# Altium PCB USB_TypeA_RevB.PcbDoc
Units mm, origin at the board's own origin, x right, y up, seen from the top; angles counter-clockwise.
Board outline 47 x 16 mm, 2 copper layers (Top Layer, Bottom Layer), stack 1.271 mm thick; 31 components, 24 nets, 131 pads, 31 vias.
Unrouted connection lines stored in the file: 17.
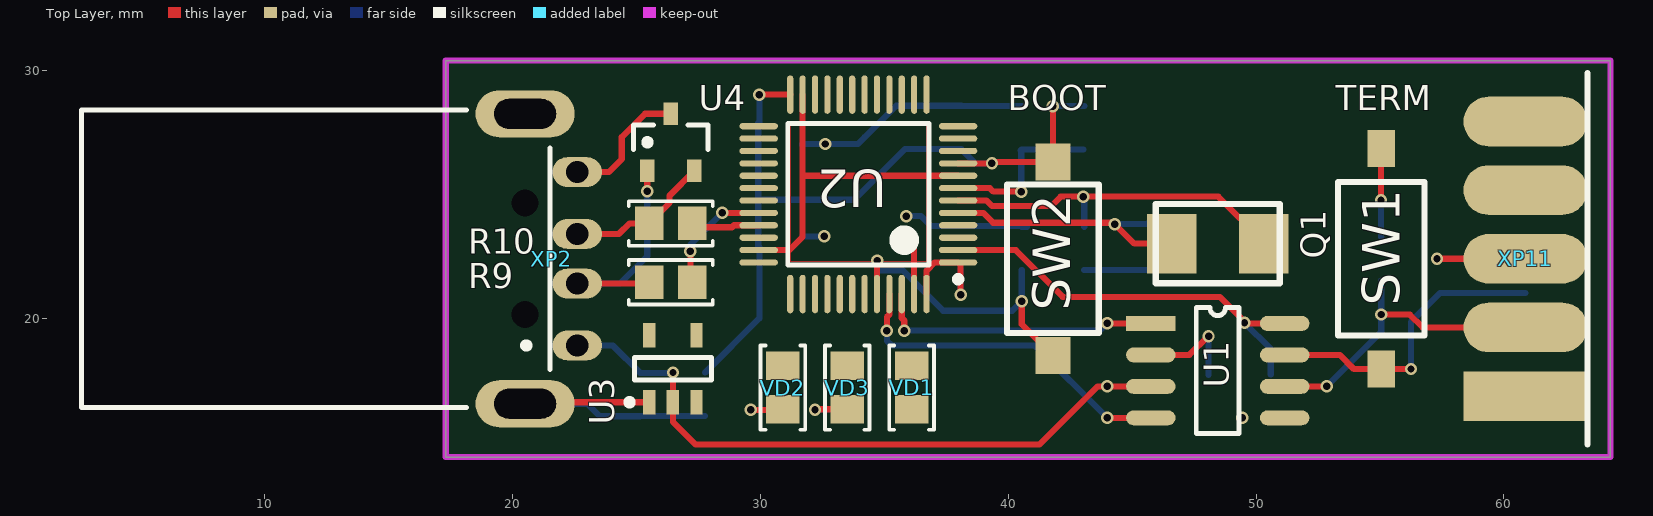
[diagram p0: Top Layer view]
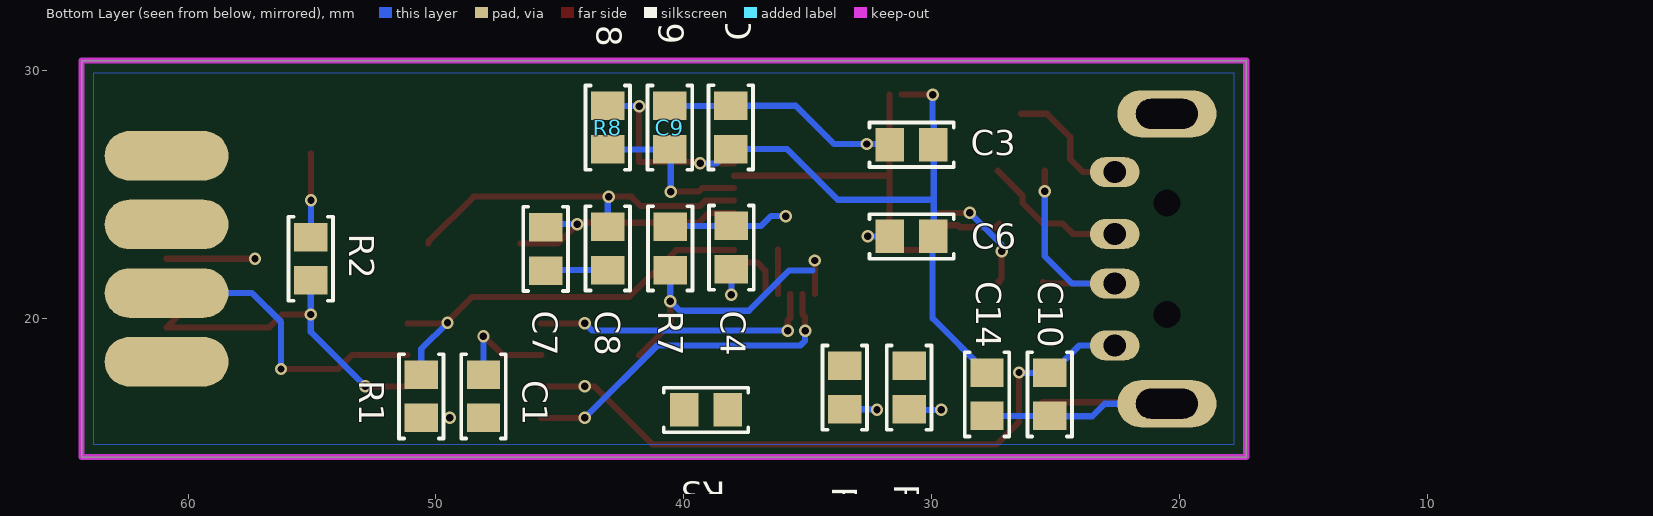
[diagram p1: Bottom Layer view, seen from below]

## Layer stack, top to bottom
Top Solder: solder mask 0.0102, Solder Resist, Dk 3.5
Top Layer: signal copper 0.0356
Dielectric 1: dielectric 1.2, FR-4, Dk 4.8
Bottom Layer: signal copper 0.0356
Bottom Solder: solder mask 0.0102, Solder Resist, Dk 3.5

## Board outline
17.3,14.4 17.3,30.4 64.3,30.4 64.3,14.4

## Design rules (kind name [scope] priority, off if disabled: settings)
Clearance [All] p1: gap=0.2 ignorepadtopadclearanceinfootprint=FALSE except(0: Arc-Hole Track-Hole SMDPad-Hole THPad-Hole Via-Hole Fill-Hole Poly-Hole Region-Hole Text-Hole; 0.254: Fill-Fill Fill-Poly Fill-Region Fill-Text Poly-Poly Poly-Region Poly-Text Region-Region Region-Text Text-Text)
MinimumAnnularRing [All] p1: minimumring=0.076
PolygonConnect [All] p1: connectstyle=Relief reliefconductorwidth=0.254 reliefentries=4 polygonreliefangle="90 Angle" airgapwidth=0.254
RoutingVias [All] p1: holewidth=0.3 width=0.5 viastyle="Through Hole" minholewidth=0.3 minwidth=0.5 maxholewidth=0.5 maxwidth=0.7
SilkToSilkClearance [All] p1: silktosilkclearance=0.2
SilkToSolderMaskClearance [IsPad] p1: minsilkscreentomaskgap=0.2 clearancetoexposedcopper=TRUE
SolderMaskExpansion [All] p1: expansion=0.102
Width [All] p1: maxlimit=0.4 minlimit=0.2 preferedwidth=0.25 minimp=50.000000 maximp=50.000000 favimp=50.000000
28 further rules are at their usual default settings.

## Classes and differential pairs
component class CAN: C1 R1 R2 SW1 U1 XP11
component class MCU: C3 C4 C5 C6 C7 C8 C9 Q1 R3 R4 R5 R7 R8 SW2 U2 VD1 VD2 VD3
component class PWR: C10 C14 U3
component class USB: R9 R10 U4 XP2

## Components (designator, comment, footprint, x,y, rotation, side; value= is the part's Value field where it differs from the comment)
C1 "100nF" SMD_0805 48.079,16.85 r90 bottom
C3 "100nF" SMD_0805 30.8,27 r0 bottom
C4 "100nF" SMD_0805 38.075,22.85 r90 bottom
C5 "100nF" SMD_0805 38.1,27.7 r90 bottom
C6 "100nF" SMD_0805 30.8,23.3 r0 bottom
C7 "22pF" SMD_0805 45.572,22.8 r270 bottom
C8 "22pF" SMD_0805 43.064,22.82 r270 bottom
C9 "100nF" SMD_0805 40.557,27.69 r90 bottom
C10 "1uF" SMD_0805 25.23,16.93 r270 bottom
C14 "100nF" SMD_0805 27.76,16.93 r270 bottom value=100n
Q1 "8MHz" 5032-2Pin_CRYSTAL 48.45,23.01 r0 top
R1 "10k" SMD_0805 50.59,16.85 r270 bottom
R2 "120" SMD_0805 55.05,22.4 r90 bottom
R3 "3k" SMD_0805 39.1,16.3 r180 bottom
R4 "620" SMD_0805 30.9,17.2 r270 bottom
R5 "620" SMD_0805 33.5,17.2 r270 bottom
R7 "10k" SMD_0805 40.542,22.82 r270 bottom
R8 "10k" SMD_0805 43.064,27.69 r90 bottom
R9 "22" SMD_0805 26.378,21.45 r180 top
R10 "22" SMD_0805 26.378,23.825 r180 top
SW1 "SW_DIP/2.54" DIP-SW/2.54/1 55.05,22.4 r180 top
SW2 "SW_SMD_6/3.7" SW_6/3.7 41.8,22.4 r90 top
U1 "TJA1051" SO8-150mil 45.75,19.79 r0 top
U2 "STM32F072C8T6" STM-LQFP48_L 33.95,25 r180 top locked
U3 "MC78LC33NTRG" SOT753 26.465,17.96 r90 top
U4 "ESDA6V1L" SOT23-3 26.378,27.1 r90 top
VD1 "RED" SMD_0805 36.1,17.2 r270 top
VD2 "GREEN" SMD_0805 30.9,17.2 r270 top
VD3 "GREEN" SMD_0805 33.5,17.2 r270 top
XP2 "USB" USB/SM2.5-4H4 17.8,22.4 r180 top
XP11 "DB9M_CABLE" DSUB-9_M_Edge 60.87,22.4 r90 top

## Footprints (in the part's own frame and the unit in brackets; to place one, negate y for a bottom-side part, rotate by r counter-clockwise, add the part's x,y. Pads: shape width x height; smd on the part's side, far side on the other; paste and mask are expansions set on the pad)
5032-2Pin_CRYSTAL [mm]
  rect 2x2.4 smd: 1(-1.85,0) 2(1.85,0)
  silkscreen extent -2.5,-1.6 2.5,1.6
DIP-SW/2.54/1 [mm]
  rect 1.1x1.5 smd: 1(0,4.45) 2(0,-4.45)
  silkscreen extent -1.74,-3.1 1.74,3.1
DSUB-9_M_Edge [mm]
  rect 2x5 smd: 1(-5.54,0)
  oval 2x5 smd: 2(-2.77,0) 3(0,0) 4(2.77,0) 5(5.54,0)
  oval 2x5 smd far side: 6(-4.155,0) 7(-1.385,0) 8(1.385,0) 9(4.155,0)
  silkscreen extent -7.5,-2.5 7.5,-2.5, body extent -15.41,-14.45 15.4,0.65, height 6.21
SMD_0805 [mm] "Chip smd, 2-Leads, Body 2.00x1.25mm, IPC Medium Density"
  rect 1.15x1.35 smd: 1(-0.875,0) 2(0.875,0)
  silkscreen extent -1.7,-0.9 1.7,0.9
SO8-150mil [mm]
  rect 2x0.6 smd: 1(0,0)
  oval 2x0.6 smd: 2(0,-1.27) 3(0,-2.54) 4(0,-3.81) 5(5.4,-3.81) 6(5.4,-2.54) 7(5.4,-1.27) 8(5.4,0)
  silkscreen extent 1.84,-4.44 3.56,0.64, body extent -0.36,-4.41 5.84,0.6, height 1.75
SOT23-3 [mm]
  rect 0.9x0.6 smd: 1(-1.15,0.95) 2(-1.15,-0.95) 3(1.15,0)
  silkscreen extent -0.3,-1.5 0.7,1.5, body extent -0.7,-1.5 0.7,1.5, height 1.1
SOT753 [mm]
  rect 1x0.5 smd: 1(-1.35,0.95) 2(-1.35,0) 3(-1.35,-0.95) 4(1.35,-0.95) 5(1.35,0.95)
  silkscreen extent -1.47,-1.55 0.45,1.87, body extent -0.85,-1.55 0.85,1.55, height 1.1
STM-LQFP48_L [mm] "QFP, 48-Leads, Body 7x7mm, Pitch 0.5mm, IPC High Density"
  oval 1.55x0.25 smd: 1(-4.025,2.75) 2(-4.025,2.25) 3(-4.025,1.75) 4(-4.025,1.25) 5(-4.025,0.75) 6(-4.025,0.25) 7(-4.025,-0.25) 8(-4.025,-0.75) 9(-4.025,-1.25) 10(-4.025,-1.75) 11(-4.025,-2.25) 12(-4.025,-2.75) 25(4.025,-2.75) 26(4.025,-2.25) 27(4.025,-1.75) 28(4.025,-1.25) 29(4.025,-0.75) 30(4.025,-0.25) 31(4.025,0.25) 32(4.025,0.75) 33(4.025,1.25) 34(4.025,1.75) 35(4.025,2.25) 36(4.025,2.75)
  oval 0.25x1.55 smd: 13(-2.75,-4.025) 14(-2.25,-4.025) 15(-1.75,-4.025) 16(-1.25,-4.025) 17(-0.75,-4.025) 18(-0.25,-4.025) 19(0.25,-4.025) 20(0.75,-4.025) 21(1.25,-4.025) 22(1.75,-4.025) 23(2.25,-4.025) 24(2.75,-4.025) 37(2.75,4.025) 38(2.25,4.025) 39(1.75,4.025) 40(1.25,4.025) 41(0.75,4.025) 42(0.25,4.025) 43(-0.25,4.025) 44(-0.75,4.025) 45(-1.25,4.025) 46(-1.75,4.025) 47(-2.25,4.025) 48(-2.75,4.025)
  silkscreen extent -4.15,-2.85 2.85,3.55, body extent -3.5,-3.5 3.5,3.5, height 1.6
SW_6/3.7 [mm]
  rect 1.5x1.4 smd: 1(3.9,0) 3(-3.9,0)
  silkscreen extent -3,-1.85 3,1.85
USB/SM2.5-4H4 [mm] "Connector; USB1.1, Type A, SM; 4 Position; Right Angle"
  oval 2x1.2 hole 0.9: 1(-4.8,3.5) 2(-4.8,1) 3(-4.8,-1) 4(-4.8,-3.5)
  oval 4x1.9 hole 1.2 slot 2.5 at 0 deg: 5(-2.7,-5.85) 6(-2.7,5.85)
  round 0.8 hole 1.1 unplated: MH1(-2.7,-2.25) MH2(-2.7,2.25)
  silkscreen extent -3.7,-6 15.2,6, body extent -4.92,-6.3 15,6.3, height 4.5

## Part data
C1 C3 C4 C5 C6 C7 C8 C9 C10 C14: library part C_NONE_POLAR, "None polar capacitor"
Q1: library part CRYSTAL, "Crystal oscillator"
R1 R2 R3 R4 R5 R7 R8 R9 R10: library part RES, "Resistor"
SW1: library part SW, "Switch"
SW2: library part SW_SMD, Manufacture=Ninigi, HelpURL=https://www.rcscomponents.kiev.ua/datasheets/tactm-idatasheet-63n.pdf, Model=TACT-63N-F
U2: "ARM Cortex-M0 32-bit MCU, 64 KB Flash, 8 KB Internal RAM, 39 I/Os, 48-pin LQFP, -40 to 85 degC, Tray", I/Os (High Current)=39, Operating Frequency(F) (Processor speed) (MHz)=48, PartNumber=STM32F030C8T6, Supplier Part Number 1=497-14043-ND, Supply Voltage(Vcc) min (V)=2.4, ComponentLink1Description="Manufacturer URL", ComponentLink1URL=http://www.st.com/web/en/home.html, ComponentLink2Description=Datasheet, ComponentLink2URL=http://www.st.com/st-web-ui/static/active/en/resource/technical/document/datasheet/DM00088500.pdf, ComponentLink3Description="Package Specification", ComponentLink3URL=http://www.st.com/st-web-ui/static/active/en/resource/technical/document/datasheet/DM00058181.pdf, Core="ARM Cortex-M0", DatasheetVersion="Rev. 1", FLASH Size (Prog) (kB)=64, Internal RAM Size (kB)=8, Mounting Technology="Surface Mount", PackageDescription="48-Pin Low Profile Quad Flat Package, 7 x 7 mm Body, 0.5 mm Pitch", PackageReference=LQFP48, PackageVersion="Rev. 6, 06/2013", Packing=Tray, Supplier 1=Digi-Key, Supplier 2=Newark, Supplier 3=Mouser, Supplier Part Number 2=06X3647, Supplier Part Number 3=511-STM32F030C8T6
U3: "Low dropout Linear Voltage Regulator"
U4: library part CDSOT23-SM712
VD1 VD2 VD3: library part LED
XP11: library part DB9F_EDGE

## Via types
v1: diameter 0.5, hole 0.3, Top Layer to Bottom Layer, tented both sides, 28 vias
v2: diameter 0.5, hole 0.3, Top Layer to Bottom Layer, 3 vias

## Nets (pads, with @x,y where several pads share a name; then routed paths per layer and width w, separated by ;. In a path a pad name is that pad's centre, name@x,y a point inside that pad or via, vN(x,y) a via of type N, cw(c..) or ccw(c..) an arc to the next point about the centre after c; other vN are vias at no path point)
+3V3: C1.1 C3.1 C4.1 C5.1 C6.1 C14.1 R1.2 R4.1 R5.1 R8.2 SW2.1 U1.5 U2.1 U2.9 U2.24 U2.36 U2.48 U3.3 | length 36.1
  Top Layer w0.25: v1(29.955,29.025) U2.24 ; U2.48 36.7,21.92 37.03,22.25 U2.1 37.97,22.245 38.075,22.14 v1(38.075,20.945) ; U2.9 v1(39.34,26.25) 39.39,26.3 SW2.1 v1(41.8,28.56)
  Bottom Layer w0.25: C14.1 29.955,20 29.955,22.87 29.925,22.9 29.905,22.92 29.905,24.78 ; v1(29.955,29.025) 29.955,27.93 29.905,27.88 29.905,24.78 ; v1@38.07,20.94 v1(38.075,20.945) C4.1 ; v1(39.34,26.25) 38.675,26.25 C5.1 35.825,26.825 33.78,24.78 29.905,24.78 ; v1(41.8,28.56) 41.805,28.565 R8.2
  other v1: 49.44,15.98
+5V: C10.1 R3.1 U1.3 U3.2 XP2.1 | length 27
  Top Layer w0.25: v1(26.47,17.81) 26.47,16.615 U3.2 26.465,15.815 27.38,14.9 41.25,14.9 43.6,17.25 U1.3
  Bottom Layer w0.25: XP2.1 24.035,18.9 25.14,17.795 26.455,17.795 v1(26.47,17.81)
  other v1: 43.99,17.25
CAN_H: SW1.1 U1.7 XP11.7 | length 12.3
  Top Layer w0.25: U1.7 53.38,18.52 53.95,17.95 SW1.1 v1(56.25,17.95)
  Bottom Layer w0.25: v1(56.25,17.95) 56.25,19.85 57.415,21.015 XP11.7
CAN_L: R2.1 U1.6 XP11.2 | length 13.7
  Top Layer w0.25: U1.6 v1(52.85,17.25) ; v1(55.05,20.15) 56.2,20.15 56.72,19.63 XP11.2 XP11.2@60.35,20.15
  Bottom Layer w0.25: v1(52.85,17.25) 55.05,19.45 v1(55.05,20.15) R2.1
CAN_RX: U1.4 U2.45 | length 13.9
  Top Layer w0.25: v1(35.1,19.5) 35.1,20.049 35.2,20.149 U2.45 ; v1(43.99,15.98) U1.4
  Bottom Layer w0.25: v1(35.1,19.5) 35.1,19.087 35.287,18.9 41.07,18.9 v1(43.99,15.98)
CAN_S: R1.1 U1.8 U2.2 | length 17
  Top Layer w0.25: U2.2 40.3,22.75 42.19,20.86 48.53,20.86 v1@49.6,19.79 ; v1(49.53,19.82) 49.56,19.79 v1@49.6,19.79 ; U1.8 v1@49.6,19.79
  Bottom Layer w0.25: v1(49.53,19.82) 50.59,18.76 R1.1
CAN_TX: U1.1 U2.46 | length 11.5
  Top Layer w0.25: U2.46 35.7,20.013 35.75,19.963 35.8,19.913 v1(35.8,19.5) ; v1@44.06,19.79 U1.1
  Bottom Layer w0.25: v1(35.8,19.5) 43.69,19.5 v1(43.99,19.8)
GND: C1.2 C3.2 C4.2 C5.2 C6.2 C7.2 C8.2 C9.2 C10.2 C14.2 R7.1 U1.2 U2.8 U2.23 U2.35 U2.47 U3.1 U4.3 VD1.1 XP2.4 XP2.5 XP2.6 XP11.3 | length 59.7
  Top Layer w0.25: XP2.6 20.56,16.61 U3.1 ; XP2.4 23.88,25.9 24.4,26.42 24.4,27.31 25.34,28.25 U4.3 ; U2.35 31.16,22.75 31.7,23.29 31.7,25.73 ; U2.23 31.7,25.73 ; U2.47 36.2,22.77 ; 36.2,25.74 36.19,25.75 ; U2.8 36.19,25.75 ; U1.2 47.31,18.52 48.07,19.28 v1(48.08,19.28) ; v1(57.3,22.4) XP11.3 ; 31.7,25.73 31.72,25.75 36.19,25.75
  Bottom Layer w0.25: XP2.6 23.01,16.55 23.515,16.045 C10.2@25.14,16.045 ; C10.2 C14.2 ; C6.2 32.57,23.3 v1(32.58,23.31) ; C3.2 31.705,27.03 v1(32.61,27.03) 33.93,27.03 34.2,27.3 ; v1(35.88,24.12) 36.48,24.12 36.875,23.725 C4.2 ; C5.2 38.11,28.565 C9.2
  Bottom Layer w0.254: 34.2,27.3 35.475,28.575 C5.2 ; C4.2 40.512,23.725 R7.1 R7.1@40.755,23.695 ; C8.2 C7.2@46.015,21.945 ; C1.2 v1(48.08,19.28)
LED1: U2.13 VD3.1
LED2: U2.12 VD2.1
NetC7_1: C7.1 Q1.1 U2.5 | length 10.7
  Top Layer w0.25: U2.5 38.987,24.25 39.387,23.85 44.25,23.85 v1(44.3,23.8) 45.09,23.01 Q1.1
  Bottom Layer w0.25: v1(44.3,23.8) 45.605,23.8 45.645,23.84 C7.1@45.81,23.675
NetC8_1: C8.1 Q1.2 U2.6 | length 14.4
  Top Layer w0.25: U2.6 39.124,24.75 39.339,24.535 41.745,24.535 42.12,24.91 v1(43.03,24.91) 48.48,24.91 50.3,23.09 Q1.2
  Bottom Layer w0.25: C8.1 v1@43.064,24.666
NetC9_1: C9.1 R8.1 U2.7 | length 6.8
  Top Layer w0.25: U2.7 39.26,25.25 39.4,25.11 v1(40.52,25.11)
  Bottom Layer w0.25: v1(40.52,25.11) 40.52,26.733 40.49,26.763 40.542,26.815 R8.1@43.034,26.815
NetR2_2: R2.2 SW1.2 | length 3.4
  Top Layer w0.25: v1(55.04,24.76) 55.04,26.64 SW1.2@55.05,26.65
  Bottom Layer w0.25: v1(55.04,24.76) 55.04,23.285 R2.2
NetR3_2: R3.2 VD1.2
NetR4_2: R4.2 VD2.2 | length 2.6
  Top Layer w0.25: v2(29.6,16.3) 30.875,16.3 VD2.2
  Bottom Layer w0.254: v2(29.6,16.3) 30.875,16.3 R4.2
NetR5_2: R5.2 VD3.2 | length 2.6
  Top Layer w0.25: v2(32.2,16.3) 32.225,16.325 VD3.2
  Bottom Layer w0.254: v2(32.2,16.3) 32.225,16.325 R5.2
NetR7_2: R7.2 SW2.3 U2.44 | length 11.9
  Top Layer w0.25: U2.44 34.7,22.32 v1(34.71,22.33) ; v1@40.552,20.682 v1(40.542,20.682) 40.542,19.758 SW2.3
  Bottom Layer w0.25: 34.81,21.93 35.74,21.93 37.37,20.3 40.16,20.3 v1(40.542,20.682) R7.2
NetR9_2: R9.2 U4.1 XP2.2 | length 9.7
  Top Layer w0.25: XP2.2 25.453,21.4 R9.2 ; v1(25.428,25.122) U4.1
  Bottom Layer w0.25: XP2.2 24.32,21.4 25.428,22.508 v1(25.428,25.122)
NetR10_2: R10.2 U4.2 XP2.3 | length 6
  Top Layer w0.25: XP2.3 24.29,23.4 24.715,23.825 R10.2 26.33,24.652 26.33,24.952 U4.2
SWCLK: U2.37
SWDIO: U2.34
USB_DM: R9.1 U2.32 | length 4.9
  Top Layer w0.25: v1(27.17,22.7) 27.17,21.613 27.293,21.49 R9.1 ; v2(28.45,24.25) U2.32
  Bottom Layer w0.25: v1(27.17,22.7) 27.17,22.97 v2(28.45,24.25)
USB_DP: R10.1 U2.33 | length 2.8
  Top Layer w0.25: R10.1 27.402,23.675 28.855,23.675 28.93,23.75 U2.33
pads on no net: U2.3 U2.4 U2.10 U2.11 U2.14 U2.15 U2.16 U2.17 U2.18 U2.19 U2.20 U2.21 U2.22 U2.25 U2.26 U2.27 U2.28 U2.29 U2.30 U2.31 U2.38 U2.39 U2.40 U2.41 U2.42 U2.43 U3.4 U3.5 XP2.MH1 XP2.MH2 XP11.1 XP11.4 XP11.5 XP11.6 XP11.8 XP11.9

## Polygon pours and split planes (outlines as drawn)
GND on Bottom Layer "Bottom-GND" (solid, shelved, pour order 2): 17.8,29.9 17.8,14.9 63.8,14.9 63.8,16.4 63.8,29.9
GND on Top Layer "Top Layer-MCU-GND" (solid, shelved, pour order 0): 31.2,27.8 31.2,22.3 36.7,22.3 36.7,27.8

## Keep-outs
Keep-Out Layer:
  the board outline again, w0.25

## Other copper
Bottom Layer:
  pour cut-out: 63.8,28.4 63.773,28.373 57.8,28.373 57.8,16.4 63.8,16.4

## Silkscreen, mask and mechanical layers (free items; w line width, h text height)
Top Overlay:
  text "BOOT" at 39.967,28.4 h1
  text "TERM" at 53.217,28.4 h1
Drill Drawing:
  circle w0.254: c21.356,64.162 r0.847
  lines w0.254: 20.509,55.695 21.356,56.118 22.203,55.695 21.779,56.542 22.203,57.388 21.356,56.965 20.509,57.388 20.933,56.542 20.509,55.695 ; 20.509,61.198 22.203,61.198 21.356,59.505 20.509,61.198 ; 20.509,67.125 22.203,67.125 22.203,68.818 20.509,68.818 20.509,67.125
  lines w0.381: 18.991,54.552 364.13,54.552 ; 18.991,69.792 364.13,69.792 ; 32.983,50.742 32.983,73.602 ; 46.695,50.742 46.695,73.602 ; 75.135,50.742 75.135,73.602 ; 87.984,50.742 87.984,73.602 ; 106.623,50.742 106.623,73.602 ; 144.711,50.742 144.711,73.602 ; 159.693,50.742 159.693,73.602 ; 178.637,50.742 178.637,73.602 ; 210.631,50.742 210.631,73.602 ; 232.317,50.742 232.317,73.602 ; 266.191,50.742 266.191,73.602 ; 300.064,50.742 300.064,73.602 ; 328.504,50.742 328.504,73.602 ; 18.991,50.742 364.13,50.742 364.13,73.602 18.991,73.602 18.991,50.742
  text "Symbol" at 21.277,70.935 h1.83
  text "Count" at 34.126,70.935 h1.83
  text "Hole Size" at 47.838,70.935 h1.83
  text "Plated" at 76.278,70.935 h1.83
  text "Hole Type" at 89.127,70.935 h1.83
  text "Drill Layer Pair" at 107.766,70.935 h1.83
  text "Via/Pad" at 145.854,70.935 h1.83
  text "Pad Shape" at 160.836,70.935 h1.83
  text "Template" at 179.78,70.935 h1.83
  text "Description" at 211.774,70.935 h1.83
  text "Hole Tolerance (+)" at 233.46,70.935 h1.83
  text "Hole Tolerance (-)" at 267.334,70.935 h1.83
  text "Hole Length" at 301.207,70.935 h1.83
  text "Routed Path Length" at 329.647,70.935 h1.83
  text "2" at 34.126,67.125 h1.52
  text "1,100mm (43,31mil)" at 47.838,67.125 h1.52
  text "NPTH" at 76.278,67.125 h1.52
  text "Round" at 89.127,67.125 h1.52
  text "Top Layer - Bottom Layer" at 107.766,67.125 h1.52
  text "Pad" at 145.854,67.125 h1.52
  text "Rounded" at 160.836,67.125 h1.52
  text "c80hn110" at 179.78,67.125 h1.52
  text "-" at 301.207,67.125 h1.52
  text "-" at 329.647,67.125 h1.52
  text "2" at 34.126,63.315 h1.52
  text "1,200mm (47,24mil)" at 47.838,63.315 h1.52
  text "PTH" at 76.278,63.315 h1.52
  text "Slot" at 89.127,63.315 h1.52
  text "Top Layer - Bottom Layer" at 107.766,63.315 h1.52
  text "Pad" at 145.854,63.315 h1.52
  text "Rounded" at 160.836,63.315 h1.52
  text "r190_400h120_250r100" at 179.78,63.315 h1.52
  text "2,500mm (98,43mil)" at 301.207,63.315 h1.52
  text "1,300mm (51,18mil)" at 329.647,63.315 h1.52
  text "4" at 34.126,59.505 h1.52
  text "0,900mm (35,43mil)" at 47.838,59.505 h1.52
  text "PTH" at 76.278,59.505 h1.52
  text "Round" at 89.127,59.505 h1.52
  text "Top Layer - Bottom Layer" at 107.766,59.505 h1.52
  text "Pad" at 145.854,59.505 h1.52
  text "Rounded" at 160.836,59.505 h1.52
  text "(Mixed)" at 179.78,59.505 h1.52
  text "-" at 301.207,59.505 h1.52
  text "-" at 329.647,59.505 h1.52
  text "31" at 34.126,55.695 h1.52
  text "0,300mm (11,81mil)" at 47.838,55.695 h1.52
  text "PTH" at 76.278,55.695 h1.52
  text "Round" at 89.127,55.695 h1.52
  text "Top Layer - Bottom Layer" at 107.766,55.695 h1.52
  text "Via" at 145.854,55.695 h1.52
  text "Rounded" at 160.836,55.695 h1.52
  text "(Mixed)" at 179.78,55.695 h1.52
  text "-" at 301.207,55.695 h1.52
  text "-" at 329.647,55.695 h1.52
  text "39 Total" at 34.126,51.885 h1.52
  text "Slot definitions :" at 21.277,48.203 h1.52
  text "Routed Path Length" at 47.507,48.203 h1.52
  text "= Calculated from tool start centre position to tool end centre position." at 75.515,48.203 h1.52
  text "Hole Length" at 47.507,45.663 h1.52
  text "= Routed Path Length + Tool Size = Slot length as defined in the PCB layout" at 65.104,45.663 h1.52

## Text inside footprints (layer, text, board x,y; h text height)
XP2: Mechanical 1 "PCB Edge" at 17.327,27.573 h0.25 r270